# Altium PCB bms_afe_tester-1_1.PcbDoc (part 4 of 6)
Units mm, origin at the board's own origin, x right, y up, seen from the top; angles counter-clockwise.
Board outline 410 x 67 mm, 4 copper layers (L1, L2, L3, L4), stack 1.586 mm thick; 598 components, 356 nets, 1901 pads, 1542 vias.
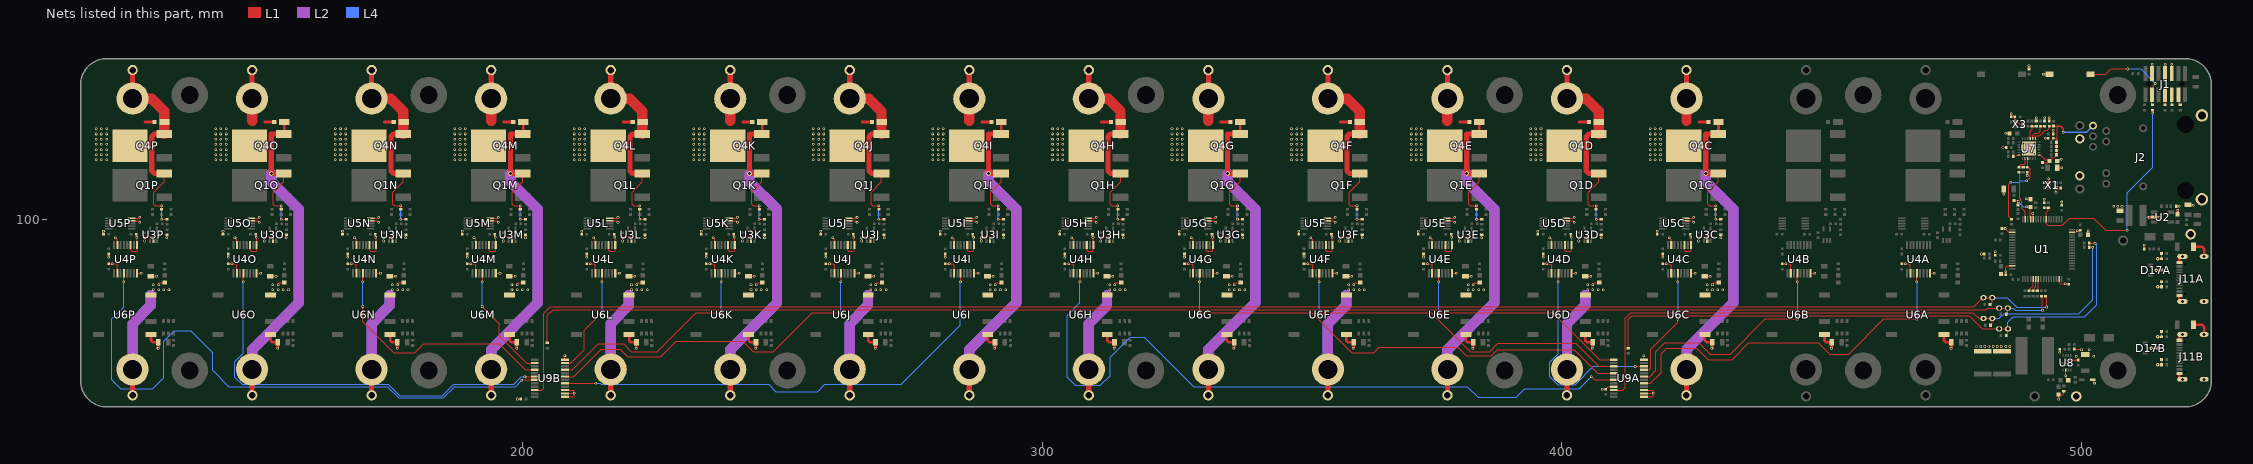
[diagram p5: the nets of this part, all layers, seen from the top]

## Via types
v1: diameter 0.5, hole 0.3, L1 to L4, 1524 vias
v2: diameter 0.65, hole 0.3, L1 to L4, 10 vias
v3: diameter 0.9, hole 0.6, L1 to L4, 8 vias

## Nets (pads, with @x,y where several pads share a name; then routed paths per layer and width w, separated by ;. In a path a pad name is that pad's centre, name@x,y a point inside that pad or via, vN(x,y) a via of type N, cw(c..) or ccw(c..) an arc to the next point about the centre after c; other vN are vias at no path point) (continued)
C2_1_N: C20C.2 C23C.2 C24C.2 C26C.2 C27C.2 D4C.2 D8C.1 H5.1 Q4C.4 R19C.1 TP9.1 U3C.2 U4C.9 U4C.11 U4C.15 U5C.4 U5C.5 U6C.4 | length 29.8
  L1 w0.2: C27C.2@418.4,97.2 v1(418.4,97.8) ; v1(419.4,92.8) C26C.2@419.4,93.4 ; v1(420.7,96.5) 421.065,96.135 U4C.15@421.065,95.1 ; U4C.11@423.605,95.1 423.605,94.095 423.8,93.9 424.7,93.9 424.875,94.075 U4C.9@424.875,95.1 424.875,96.525 v1(424.8,96.6) 424.8,97.1 C24C.2@424.7,97.2 ; U5C.4@423.847,99.775 425.125,99.775 v1(425.4,99.5) ; U5C.5@423.847,100.275 425.175,100.275 v1(425.4,100.5) ; v1(426.3,95.9) C20C.2@426.3,96.5 426.6,96.8 427.8,96.8 428,96.6 U3C.2@428,96 ; C23C.2@427.5,89.15 427.55,89.1 v1(428.6,89.1) v1@428.55,89.15 ; v1(429,87.5) 429,87.781 429.119,87.9 D4C.2@430.2,87.9 ; v1(430.6,96.5) R19C.1@430.6,97.1
  L1 w0.5: 426.4,118.8 D8C.1@428.25,118.8
  L1 w1: H5.1@424,123.3 TP9.1@424,128.8
  L1 w2: 424,119 H5.1@424,123.3
  other v1: 428,86.5 429,86.5 430,86.5 431,86.5 428,87.5 417,111.5 418,111.5 419,111.5 417,112.5 418,112.5 419,112.5 417,113.5 418,113.5 419,113.5 417,114.5 418,114.5 419,114.5 417,115.5 418,115.5 419,115.5 417,116.5 418,116.5 419,116.5 417,117.5 418,117.5 419,117.5
C2_1_P: D8C.2 H6.1 Q1C.3 Q4C.3 R17C.1 R53C.1 TP8.1 | length 119.6
  L1 w0.2: v1(429.6,100.1) R17C.1@430.6,100.1 ; R53C.1@429.6,102 v1(429.6,102.7) 428.4,102.7 428.1,103 428.1,105.3 430.1,107.3 Q1C.3@430.1,108.886
  L1 w0.5: Q4C.3@430.1,116.486 430.15,116.536 D8C.2@430.15,118.8
  L1 w1: TP8.1@424,66.2 H6.1@424,71.2 ; v3(427.7,108.9) 427.7,116.486 Q4C.3@430.1,116.486 ; v3@427.714,108.886 Q1C.3@430.1,108.886
  L2 w2: H6.1@424,71.2 424,75 433,84 433,102 427.7,107.3 v3(427.7,108.9)
  L4 w0.2: v1(429.6,100.1) v1(429.6,102.7)
  L4 w2: H6.1@424,71.2 424,75 433,84 433,102 427.7,107.3 v3(427.7,108.9)
C3_1_N: C20D.2 C23D.2 C24D.2 C26D.2 C27D.2 D4D.2 D8D.1 H7.1 Q4D.4 R19D.1 TP11.1 U3D.2 U4D.9 U4D.11 U4D.15 U5D.4 U5D.5 U6D.4 | length 56.5
  L1 w0.2: C27D.2@395.4,97.2 v1(395.4,97.8) ; v1(396.4,92.8) C26D.2@396.4,93.4 ; v1(397.7,96.5) 398.065,96.135 U4D.15@398.065,95.1 ; U4D.11@400.605,95.1 400.605,94.095 400.8,93.9 401.7,93.9 401.875,94.075 U4D.9@401.875,95.1 401.875,96.525 v1(401.8,96.6) 401.8,97.1 C24D.2@401.7,97.2 ; U5D.4@400.847,99.775 402.125,99.775 v1(402.4,99.5) ; U5D.5@400.847,100.275 402.175,100.275 v1(402.4,100.5) ; v1(403.3,95.9) C20D.2@403.3,96.5 403.6,96.8 404.8,96.8 405,96.6 U3D.2@405,96 ; C23D.2@404.5,89.15 404.55,89.1 v1(405.6,89.1) v1@405.55,89.15 ; v1(406,87.5) 406,87.781 406.119,87.9 D4D.2@407.2,87.9 ; v1(407.6,96.5) R19D.1@407.6,97.1
  L1 w0.5: 403.4,118.8 D8D.1@405.25,118.8
  L1 w1: TP11.1@401,66.2 H7.1@401,71.2
  L2 w2: H7.1@401,71.2 401,80 404.5,83.5 404.5,85.5
  L4 w2: H7.1@401,71.2 401,80 404.5,83.5 404.5,85.5
  other v1: 405,86.5 406,86.5 407,86.5 408,86.5 405,87.5 394,111.5 395,111.5 396,111.5 394,112.5 395,112.5 396,112.5 394,113.5 395,113.5 396,113.5 394,114.5 395,114.5 396,114.5 394,115.5 395,115.5 396,115.5 394,116.5 395,116.5 396,116.5 394,117.5 395,117.5 396,117.5
C3_1_P: D8D.2 H8.1 Q1D.3 Q4D.3 R17D.1 R53D.1 TP10.1 | length 41.5
  L1 w0.2: v1(406.6,100.1) R17D.1@407.6,100.1 ; R53D.1@406.6,102 v1(406.6,102.7) 405.4,102.7 405.1,103 405.1,105.3 407.1,107.3 Q1D.3@407.1,108.886
  L1 w0.5: Q4D.3@407.1,116.486 Q4D.3@407.15,116.536
  L1 w1: H8.1@401,123.3 TP10.1@401,128.8 ; Q1D.3@407.1,108.886 405.214,108.886 404.7,109.4 404.7,116 405.186,116.486 Q4D.3@407.1,116.486
  L1 w2: H8.1@401,123.3 404.7,123.3 407.1,120.9 Q4D.3@407.1,116.486
  L4 w0.2: v1(406.6,100.1) v1(406.6,102.7)
C4_1_N: C20E.2 C23E.2 C24E.2 C26E.2 C27E.2 D4E.2 D8E.1 H9.1 Q4E.4 R19E.1 TP13.1 U3E.2 U4E.9 U4E.11 U4E.15 U5E.4 U5E.5 U6E.4 | length 29.8
  L1 w0.2: C27E.2@372.4,97.2 v1(372.4,97.8) ; v1(373.4,92.8) C26E.2@373.4,93.4 ; v1(374.7,96.5) 375.065,96.135 U4E.15@375.065,95.1 ; U4E.11@377.605,95.1 377.605,94.095 377.8,93.9 378.7,93.9 378.875,94.075 U4E.9@378.875,95.1 378.875,96.525 v1(378.8,96.6) 378.8,97.1 C24E.2@378.7,97.2 ; U5E.4@377.847,99.775 379.125,99.775 v1(379.4,99.5) ; U5E.5@377.847,100.275 379.175,100.275 v1(379.4,100.5) ; v1(380.3,95.9) C20E.2@380.3,96.5 380.6,96.8 381.8,96.8 382,96.6 U3E.2@382,96 ; C23E.2@381.5,89.15 381.55,89.1 v1(382.6,89.1) v1@382.55,89.15 ; v1(383,87.5) 383,87.781 383.119,87.9 D4E.2@384.2,87.9 ; v1(384.6,96.5) R19E.1@384.6,97.1
  L1 w0.5: 380.4,118.8 D8E.1@382.25,118.8
  L1 w1: H9.1@378,123.3 TP13.1@378,128.8
  L1 w2: 378,119 H9.1@378,123.3
  other v1: 382,86.5 383,86.5 384,86.5 385,86.5 382,87.5 371,111.5 372,111.5 373,111.5 371,112.5 372,112.5 373,112.5 371,113.5 372,113.5 373,113.5 371,114.5 372,114.5 373,114.5 371,115.5 372,115.5 373,115.5 371,116.5 372,116.5 373,116.5 371,117.5 372,117.5 373,117.5
C4_1_P: D8E.2 H10.1 Q1E.3 Q4E.3 R17E.1 R53E.1 TP12.1 | length 119.6
  L1 w0.2: v1(383.6,100.1) R17E.1@384.6,100.1 ; R53E.1@383.6,102 v1(383.6,102.7) 382.4,102.7 382.1,103 382.1,105.3 384.1,107.3 Q1E.3@384.1,108.886
  L1 w0.5: Q4E.3@384.1,116.486 384.15,116.536 D8E.2@384.15,118.8
  L1 w1: TP12.1@378,66.2 H10.1@378,71.2 ; v3(381.7,108.9) 381.7,116.486 Q4E.3@384.1,116.486 ; v3@381.714,108.886 Q1E.3@384.1,108.886
  L2 w2: H10.1@378,71.2 378,75 387,84 387,102 381.7,107.3 v3(381.7,108.9)
  L4 w0.2: v1(383.6,100.1) v1(383.6,102.7)
  L4 w2: H10.1@378.014,71.186 378.014,74.986 387.014,83.986 387.014,101.986 381.714,107.286 v3@381.714,108.886
C5_1_N: C20F.2 C23F.2 C24F.2 C26F.2 C27F.2 D4F.2 D8F.1 H11.1 Q4F.4 R19F.1 TP15.1 U3F.2 U4F.9 U4F.11 U4F.15 U5F.4 U5F.5 U6F.4 | length 56.5
  L1 w0.2: C27F.2@349.4,97.2 v1(349.4,97.8) ; v1(350.4,92.8) C26F.2@350.4,93.4 ; v1(351.7,96.5) 352.065,96.135 U4F.15@352.065,95.1 ; U4F.11@354.605,95.1 354.605,94.095 354.8,93.9 355.7,93.9 355.875,94.075 U4F.9@355.875,95.1 355.875,96.525 v1(355.8,96.6) 355.8,97.1 C24F.2@355.7,97.2 ; U5F.4@354.847,99.775 356.125,99.775 v1(356.4,99.5) ; U5F.5@354.847,100.275 356.175,100.275 v1(356.4,100.5) ; v1(357.3,95.9) C20F.2@357.3,96.5 357.6,96.8 358.8,96.8 359,96.6 U3F.2@359,96 ; C23F.2@358.5,89.15 358.55,89.1 v1(359.6,89.1) v1@359.55,89.15 ; v1(360,87.5) 360,87.781 360.119,87.9 D4F.2@361.2,87.9 ; v1(361.6,96.5) R19F.1@361.6,97.1
  L1 w0.5: 357.4,118.8 D8F.1@359.25,118.8
  L1 w1: TP15.1@355,66.2 H11.1@355,71.2
  L2 w2: H11.1@355,71.2 355,80 358.5,83.5 358.5,85.5
  L4 w2: H11.1@355,71.2 355,80 358.5,83.5 358.5,85.5
  other v1: 359,86.5 360,86.5 361,86.5 362,86.5 359,87.5 348,111.5 349,111.5 350,111.5 348,112.5 349,112.5 350,112.5 348,113.5 349,113.5 350,113.5 348,114.5 349,114.5 350,114.5 348,115.5 349,115.5 350,115.5 348,116.5 349,116.5 350,116.5 348,117.5 349,117.5 350,117.5
C5_1_P: D8F.2 H12.1 Q1F.3 Q4F.3 R17F.1 R53F.1 TP14.1 | length 41.5
  L1 w0.2: v1(360.6,100.1) R17F.1@361.6,100.1 ; R53F.1@360.6,102 v1(360.6,102.7) 359.4,102.7 359.1,103 359.1,105.3 361.1,107.3 Q1F.3@361.1,108.886
  L1 w0.5: Q4F.3@361.1,116.486 Q4F.3@361.15,116.536
  L1 w1: H12.1@355,123.3 TP14.1@355,128.8 ; Q1F.3@361.1,108.886 359.214,108.886 358.7,109.4 358.7,116 359.186,116.486 Q4F.3@361.1,116.486
  L1 w2: H12.1@355,123.3 358.7,123.3 361.1,120.9 Q4F.3@361.1,116.486
  L4 w0.2: v1(360.6,100.1) v1(360.6,102.7)
C6_1_N: C20G.2 C23G.2 C24G.2 C26G.2 C27G.2 D4G.2 D8G.1 H13.1 Q4G.4 R19G.1 TP17.1 U3G.2 U4G.9 U4G.11 U4G.15 U5G.4 U5G.5 U6G.4 | length 29.8
  L1 w0.2: C27G.2@326.4,97.2 v1(326.4,97.8) ; v1(327.4,92.8) C26G.2@327.4,93.4 ; v1(328.7,96.5) 329.065,96.135 U4G.15@329.065,95.1 ; U4G.11@331.605,95.1 331.605,94.095 331.8,93.9 332.7,93.9 332.875,94.075 U4G.9@332.875,95.1 332.875,96.525 v1(332.8,96.6) 332.8,97.1 C24G.2@332.7,97.2 ; U5G.4@331.847,99.775 333.125,99.775 v1(333.4,99.5) ; U5G.5@331.847,100.275 333.175,100.275 v1(333.4,100.5) ; v1(334.3,95.9) C20G.2@334.3,96.5 334.6,96.8 335.8,96.8 336,96.6 U3G.2@336,96 ; C23G.2@335.5,89.15 335.55,89.1 v1(336.6,89.1) v1@336.55,89.15 ; v1(337,87.5) 337,87.781 337.119,87.9 D4G.2@338.2,87.9 ; v1(338.6,96.5) R19G.1@338.6,97.1
  L1 w0.5: 334.4,118.8 D8G.1@336.25,118.8
  L1 w1: H13.1@332,123.3 TP17.1@332,128.8
  L1 w2: 332,119 H13.1@332,123.3
  other v1: 336,86.5 337,86.5 338,86.5 339,86.5 336,87.5 325,111.5 326,111.5 327,111.5 325,112.5 326,112.5 327,112.5 325,113.5 326,113.5 327,113.5 325,114.5 326,114.5 327,114.5 325,115.5 326,115.5 327,115.5 325,116.5 326,116.5 327,116.5 325,117.5 326,117.5 327,117.5
C6_1_P: D8G.2 H14.1 Q1G.3 Q4G.3 R17G.1 R53G.1 TP16.1 | length 119.6
  L1 w0.2: v1(337.6,100.1) R17G.1@338.6,100.1 ; R53G.1@337.6,102 v1(337.6,102.7) 336.4,102.7 336.1,103 336.1,105.3 338.1,107.3 Q1G.3@338.1,108.886
  L1 w0.5: Q4G.3@338.1,116.486 338.15,116.536 D8G.2@338.15,118.8
  L1 w1: TP16.1@332,66.2 H14.1@332,71.2 ; v3(335.7,108.9) 335.7,116.486 Q4G.3@338.1,116.486 ; v3@335.714,108.886 Q1G.3@338.1,108.886
  L2 w2: H14.1@332,71.2 332,75 341,84 341,102 335.7,107.3 v3(335.7,108.9)
  L4 w0.2: v1(337.6,100.1) v1(337.6,102.7)
  L4 w2: H14.1@332,71.2 332,75 341,84 341,102 335.7,107.3 v3(335.7,108.9)
C7_1_N: C20H.2 C23H.2 C24H.2 C26H.2 C27H.2 D4H.2 D8H.1 H15.1 Q4H.4 R19H.1 TP19.1 U3H.2 U4H.9 U4H.11 U4H.15 U5H.4 U5H.5 U6H.4 | length 56.5
  L1 w0.2: C27H.2@303.4,97.2 v1(303.4,97.8) ; v1(304.4,92.8) C26H.2@304.4,93.4 ; v1(305.7,96.5) 306.065,96.135 U4H.15@306.065,95.1 ; U4H.11@308.605,95.1 308.605,94.095 308.8,93.9 309.7,93.9 309.875,94.075 U4H.9@309.875,95.1 309.875,96.525 v1(309.8,96.6) 309.8,97.1 C24H.2@309.7,97.2 ; U5H.4@308.847,99.775 310.125,99.775 v1(310.4,99.5) ; U5H.5@308.847,100.275 310.175,100.275 v1(310.4,100.5) ; v1(311.3,95.9) C20H.2@311.3,96.5 311.6,96.8 312.8,96.8 313,96.6 U3H.2@313,96 ; C23H.2@312.5,89.15 312.55,89.1 v1(313.6,89.1) v1@313.55,89.15 ; v1(314,87.5) 314,87.781 314.119,87.9 D4H.2@315.2,87.9 ; v1(315.6,96.5) R19H.1@315.6,97.1
  L1 w0.5: 311.4,118.8 D8H.1@313.25,118.8
  L1 w1: TP19.1@309,66.2 H15.1@309,71.2
  L2 w2: H15.1@309,71.2 309,80 312.5,83.5 312.5,85.5
  L4 w2: H15.1@309,71.2 309,80 312.5,83.5 312.5,85.5
  other v1: 313,86.5 314,86.5 315,86.5 316,86.5 313,87.5 302,111.5 303,111.5 304,111.5 302,112.5 303,112.5 304,112.5 302,113.5 303,113.5 304,113.5 302,114.5 303,114.5 304,114.5 302,115.5 303,115.5 304,115.5 302,116.5 303,116.5 304,116.5 302,117.5 303,117.5 304,117.5
C7_1_P: D8H.2 H16.1 Q1H.3 Q4H.3 R17H.1 R53H.1 TP18.1 | length 41.5
  L1 w0.2: v1(314.6,100.1) R17H.1@315.6,100.1 ; R53H.1@314.6,102 v1(314.6,102.7) 313.4,102.7 313.1,103 313.1,105.3 315.1,107.3 Q1H.3@315.1,108.886
  L1 w0.5: Q4H.3@315.1,116.486 Q4H.3@315.15,116.536
  L1 w1: H16.1@309,123.3 TP18.1@309,128.8 ; Q1H.3@315.1,108.886 313.214,108.886 312.7,109.4 312.7,116 313.186,116.486 Q4H.3@315.1,116.486
  L1 w2: H16.1@309,123.3 312.7,123.3 315.1,120.9 Q4H.3@315.1,116.486
  L4 w0.2: v1(314.6,100.1) v1(314.6,102.7)
C8_1_N: C20I.2 C23I.2 C24I.2 C26I.2 C27I.2 D4I.2 D8I.1 H17.1 Q4I.4 R19I.1 TP21.1 U3I.2 U4I.9 U4I.11 U4I.15 U5I.4 U5I.5 U6I.4 | length 29.8
  L1 w0.2: C27I.2@280.4,97.2 v1(280.4,97.8) ; v1(281.4,92.8) C26I.2@281.4,93.4 ; v1(282.7,96.5) 283.065,96.135 U4I.15@283.065,95.1 ; U4I.11@285.605,95.1 285.605,94.095 285.8,93.9 286.7,93.9 286.875,94.075 U4I.9@286.875,95.1 286.875,96.525 v1(286.8,96.6) 286.8,97.1 C24I.2@286.7,97.2 ; U5I.4@285.847,99.775 287.125,99.775 v1(287.4,99.5) ; U5I.5@285.847,100.275 287.175,100.275 v1(287.4,100.5) ; v1(288.3,95.9) C20I.2@288.3,96.5 288.6,96.8 289.8,96.8 290,96.6 U3I.2@290,96 ; C23I.2@289.5,89.15 289.55,89.1 v1(290.6,89.1) v1@290.55,89.15 ; v1(291,87.5) 291,87.781 291.119,87.9 D4I.2@292.2,87.9 ; v1(292.6,96.5) R19I.1@292.6,97.1
  L1 w0.5: 288.4,118.8 D8I.1@290.25,118.8
  L1 w1: H17.1@286,123.3 TP21.1@286,128.8
  L1 w2: 286,119 H17.1@286,123.3
  other v1: 290,86.5 291,86.5 292,86.5 293,86.5 290,87.5 279,111.5 280,111.5 281,111.5 279,112.5 280,112.5 281,112.5 279,113.5 280,113.5 281,113.5 279,114.5 280,114.5 281,114.5 279,115.5 280,115.5 281,115.5 279,116.5 280,116.5 281,116.5 279,117.5 280,117.5 281,117.5
C8_1_P: D8I.2 H18.1 Q1I.3 Q4I.3 R17I.1 R53I.1 TP20.1 | length 119.6
  L1 w0.2: v1(291.6,100.1) R17I.1@292.6,100.1 ; R53I.1@291.6,102 v1(291.6,102.7) 290.4,102.7 290.1,103 290.1,105.3 292.1,107.3 Q1I.3@292.1,108.886
  L1 w0.5: Q4I.3@292.1,116.486 292.15,116.536 D8I.2@292.15,118.8
  L1 w1: TP20.1@286,66.2 H18.1@286,71.2 ; v3(289.7,108.9) 289.7,116.486 Q4I.3@292.1,116.486 ; v3@289.714,108.886 Q1I.3@292.1,108.886
  L2 w2: H18.1@286,71.2 286,75 295,84 295,102 289.7,107.3 v3(289.7,108.9)
  L4 w0.2: v1(291.6,100.1) v1(291.6,102.7)
  L4 w2: H18.1@286,71.2 286,75 295,84 295,102 289.7,107.3 v3(289.7,108.9)
C9_1_N: C20J.2 C23J.2 C24J.2 C26J.2 C27J.2 D4J.2 D8J.1 H19.1 Q4J.4 R19J.1 TP23.1 U3J.2 U4J.9 U4J.11 U4J.15 U5J.4 U5J.5 U6J.4 | length 56.5
  L1 w0.2: C27J.2@257.4,97.2 v1(257.4,97.8) ; v1(258.4,92.8) C26J.2@258.4,93.4 ; v1(259.7,96.5) 260.065,96.135 U4J.15@260.065,95.1 ; U4J.11@262.605,95.1 262.605,94.095 262.8,93.9 263.7,93.9 263.875,94.075 U4J.9@263.875,95.1 263.875,96.525 v1(263.8,96.6) 263.8,97.1 C24J.2@263.7,97.2 ; U5J.4@262.847,99.775 264.125,99.775 v1(264.4,99.5) ; U5J.5@262.847,100.275 264.175,100.275 v1(264.4,100.5) ; v1(265.3,95.9) C20J.2@265.3,96.5 265.6,96.8 266.8,96.8 267,96.6 U3J.2@267,96 ; C23J.2@266.5,89.15 266.55,89.1 v1(267.6,89.1) v1@267.55,89.15 ; v1(268,87.5) 268,87.781 268.119,87.9 D4J.2@269.2,87.9 ; v1(269.6,96.5) R19J.1@269.6,97.1
  L1 w0.5: 265.4,118.8 D8J.1@267.25,118.8
  L1 w1: TP23.1@263,66.2 H19.1@263,71.2
  L2 w2: H19.1@263,71.2 263,80 266.5,83.5 266.5,85.5
  L4 w2: H19.1@263,71.2 263,80 266.5,83.5 266.5,85.5
  other v1: 267,86.5 268,86.5 269,86.5 270,86.5 267,87.5 256,111.5 257,111.5 258,111.5 256,112.5 257,112.5 258,112.5 256,113.5 257,113.5 258,113.5 256,114.5 257,114.5 258,114.5 256,115.5 257,115.5 258,115.5 256,116.5 257,116.5 258,116.5 256,117.5 257,117.5 258,117.5
C9_1_P: D8J.2 H20.1 Q1J.3 Q4J.3 R17J.1 R53J.1 TP22.1 | length 41.5
  L1 w0.2: v1(268.6,100.1) R17J.1@269.6,100.1 ; R53J.1@268.6,102 v1(268.6,102.7) 267.4,102.7 267.1,103 267.1,105.3 269.1,107.3 Q1J.3@269.1,108.886
  L1 w0.5: Q4J.3@269.1,116.486 Q4J.3@269.15,116.536
  L1 w1: H20.1@263,123.3 TP22.1@263,128.8 ; Q1J.3@269.1,108.886 267.214,108.886 266.7,109.4 266.7,116 267.186,116.486 Q4J.3@269.1,116.486
  L1 w2: H20.1@263,123.3 266.7,123.3 269.1,120.9 Q4J.3@269.1,116.486
  L4 w0.2: v1(268.6,100.1) v1(268.6,102.7)
C10_1_N: C20K.2 C23K.2 C24K.2 C26K.2 C27K.2 D4K.2 D8K.1 H21.1 Q4K.4 R19K.1 TP25.1 U3K.2 U4K.9 U4K.11 U4K.15 U5K.4 U5K.5 U6K.4 | length 29.8
  L1 w0.2: C27K.2@234.4,97.2 v1(234.4,97.8) ; v1(235.4,92.8) C26K.2@235.4,93.4 ; v1(236.7,96.5) 237.065,96.135 U4K.15@237.065,95.1 ; U4K.11@239.605,95.1 239.605,94.095 239.8,93.9 240.7,93.9 240.875,94.075 U4K.9@240.875,95.1 240.875,96.525 v1(240.8,96.6) 240.8,97.1 C24K.2@240.7,97.2 ; U5K.4@239.847,99.775 241.125,99.775 v1(241.4,99.5) ; U5K.5@239.847,100.275 241.175,100.275 v1(241.4,100.5) ; v1(242.3,95.9) C20K.2@242.3,96.5 242.6,96.8 243.8,96.8 244,96.6 U3K.2@244,96 ; C23K.2@243.5,89.15 243.55,89.1 v1(244.6,89.1) v1@244.55,89.15 ; v1(245,87.5) 245,87.781 245.119,87.9 D4K.2@246.2,87.9 ; v1(246.6,96.5) R19K.1@246.6,97.1
  L1 w0.5: 242.4,118.8 D8K.1@244.25,118.8
  L1 w1: H21.1@240,123.3 TP25.1@240,128.8
  L1 w2: 240,119 H21.1@240,123.3
  other v1: 244,86.5 245,86.5 246,86.5 247,86.5 244,87.5 233,111.5 234,111.5 235,111.5 233,112.5 234,112.5 235,112.5 233,113.5 234,113.5 235,113.5 233,114.5 234,114.5 235,114.5 233,115.5 234,115.5 235,115.5 233,116.5 234,116.5 235,116.5 233,117.5 234,117.5 235,117.5
C10_1_P: D8K.2 H22.1 Q1K.3 Q4K.3 R17K.1 R53K.1 TP24.1 | length 119.6
  L1 w0.2: v1(245.6,100.1) R17K.1@246.6,100.1 ; R53K.1@245.6,102 v1(245.6,102.7) 244.4,102.7 244.1,103 244.1,105.3 246.1,107.3 Q1K.3@246.1,108.886
  L1 w0.5: Q4K.3@246.1,116.486 246.15,116.536 D8K.2@246.15,118.8
  L1 w1: TP24.1@240,66.2 H22.1@240,71.2 ; v3(243.7,108.9) 243.7,116.486 Q4K.3@246.1,116.486 ; v3@243.714,108.886 Q1K.3@246.1,108.886
  L2 w2: H22.1@240,71.2 240,75 249,84 249,102 243.7,107.3 v3(243.7,108.9)
  L4 w0.2: v1(245.6,100.1) v1(245.6,102.7)
  L4 w2: H22.1@240,71.2 240,75 249,84 249,102 243.7,107.3 v3(243.7,108.9)
C11_1_N: C20L.2 C23L.2 C24L.2 C26L.2 C27L.2 D4L.2 D8L.1 H23.1 Q4L.4 R19L.1 TP27.1 U3L.2 U4L.9 U4L.11 U4L.15 U5L.4 U5L.5 U6L.4 | length 56.5
  L1 w0.2: C27L.2@211.4,97.2 v1(211.4,97.8) ; v1(212.4,92.8) C26L.2@212.4,93.4 ; v1(213.7,96.5) 214.065,96.135 U4L.15@214.065,95.1 ; U4L.11@216.605,95.1 216.605,94.095 216.8,93.9 217.7,93.9 217.875,94.075 U4L.9@217.875,95.1 217.875,96.525 v1(217.8,96.6) 217.8,97.1 C24L.2@217.7,97.2 ; U5L.4@216.847,99.775 218.125,99.775 v1(218.4,99.5) ; U5L.5@216.847,100.275 218.175,100.275 v1(218.4,100.5) ; v1(219.3,95.9) C20L.2@219.3,96.5 219.6,96.8 220.8,96.8 221,96.6 U3L.2@221,96 ; C23L.2@220.5,89.15 220.55,89.1 v1(221.6,89.1) v1@221.55,89.15 ; v1(222,87.5) 222,87.781 222.119,87.9 D4L.2@223.2,87.9 ; v1(223.6,96.5) R19L.1@223.6,97.1
  L1 w0.5: 219.4,118.8 D8L.1@221.25,118.8
  L1 w1: TP27.1@217,66.2 H23.1@217,71.2
  L2 w2: H23.1@217,71.2 217,80 220.5,83.5 220.5,85.5
  L4 w2: H23.1@217,71.2 217,80 220.5,83.5 220.5,85.5
  other v1: 221,86.5 222,86.5 223,86.5 224,86.5 221,87.5 210,111.5 211,111.5 212,111.5 210,112.5 211,112.5 212,112.5 210,113.5 211,113.5 212,113.5 210,114.5 211,114.5 212,114.5 210,115.5 211,115.5 212,115.5 210,116.5 211,116.5 212,116.5 210,117.5 211,117.5 212,117.5
C11_1_P: D8L.2 H24.1 Q1L.3 Q4L.3 R17L.1 R53L.1 TP26.1 | length 41.5
  L1 w0.2: v1(222.6,100.1) R17L.1@223.6,100.1 ; R53L.1@222.6,102 v1(222.6,102.7) 221.4,102.7 221.1,103 221.1,105.3 223.1,107.3 Q1L.3@223.1,108.886
  L1 w0.5: Q4L.3@223.1,116.486 Q4L.3@223.15,116.536
  L1 w1: H24.1@217,123.3 TP26.1@217,128.8 ; Q1L.3@223.1,108.886 221.214,108.886 220.7,109.4 220.7,116 221.186,116.486 Q4L.3@223.1,116.486
  L1 w2: H24.1@217,123.3 220.7,123.3 223.1,120.9 Q4L.3@223.1,116.486
  L4 w0.2: v1(222.6,100.1) v1(222.6,102.7)
C12_1_N: C20M.2 C23M.2 C24M.2 C26M.2 C27M.2 D4M.2 D8M.1 H25.1 Q4M.4 R19M.1 TP29.1 U3M.2 U4M.9 U4M.11 U4M.15 U5M.4 U5M.5 U6M.4 | length 29.8
  L1 w0.2: C27M.2@188.4,97.2 v1(188.4,97.8) ; v1(189.4,92.8) C26M.2@189.4,93.4 ; v1(190.7,96.5) 191.065,96.135 U4M.15@191.065,95.1 ; U4M.11@193.605,95.1 193.605,94.095 193.8,93.9 194.7,93.9 194.875,94.075 U4M.9@194.875,95.1 194.875,96.525 v1(194.8,96.6) 194.8,97.1 C24M.2@194.7,97.2 ; U5M.4@193.847,99.775 195.125,99.775 v1(195.4,99.5) ; U5M.5@193.847,100.275 195.175,100.275 v1(195.4,100.5) ; v1(196.3,95.9) C20M.2@196.3,96.5 196.6,96.8 197.8,96.8 198,96.6 U3M.2@198,96 ; C23M.2@197.5,89.15 197.55,89.1 v1(198.6,89.1) v1@198.55,89.15 ; v1(199,87.5) 199,87.781 199.119,87.9 D4M.2@200.2,87.9 ; v1(200.6,96.5) R19M.1@200.6,97.1
  L1 w0.5: 196.4,118.8 D8M.1@198.25,118.8
  L1 w1: H25.1@194,123.3 TP29.1@194,128.8
  L1 w2: 194,119 H25.1@194,123.3
  other v1: 198,86.5 199,86.5 200,86.5 201,86.5 198,87.5 187,111.5 188,111.5 189,111.5 187,112.5 188,112.5 189,112.5 187,113.5 188,113.5 189,113.5 187,114.5 188,114.5 189,114.5 187,115.5 188,115.5 189,115.5 187,116.5 188,116.5 189,116.5 187,117.5 188,117.5 189,117.5
C12_1_P: D8M.2 H26.1 Q1M.3 Q4M.3 R17M.1 R53M.1 TP28.1 | length 119.6
  L1 w0.2: v1(199.6,100.1) R17M.1@200.6,100.1 ; R53M.1@199.6,102 v1(199.6,102.7) 198.4,102.7 198.1,103 198.1,105.3 200.1,107.3 Q1M.3@200.1,108.886
  L1 w0.5: Q4M.3@200.1,116.486 200.15,116.536 D8M.2@200.15,118.8
  L1 w1: TP28.1@194,66.2 H26.1@194,71.2 ; v3(197.7,108.9) 197.7,116.486 Q4M.3@200.1,116.486 ; v3@197.714,108.886 Q1M.3@200.1,108.886
  L2 w2: H26.1@194,71.2 194,75 203,84 203,102 197.7,107.3 v3(197.7,108.9)
  L4 w0.2: v1(199.6,100.1) v1(199.6,102.7)
  L4 w2: H26.1@194,71.2 194,75 203,84 203,102 197.7,107.3 v3(197.7,108.9)
C13_1_N: C20N.2 C23N.2 C24N.2 C26N.2 C27N.2 D4N.2 D8N.1 H27.1 Q4N.4 R19N.1 TP31.1 U3N.2 U4N.9 U4N.11 U4N.15 U5N.4 U5N.5 U6N.4 | length 56.5
  L1 w0.2: C27N.2@165.4,97.2 v1(165.4,97.8) ; v1(166.4,92.8) C26N.2@166.4,93.4 ; v1(167.7,96.5) 168.065,96.135 U4N.15@168.065,95.1 ; U4N.11@170.605,95.1 170.605,94.095 170.8,93.9 171.7,93.9 171.875,94.075 U4N.9@171.875,95.1 171.875,96.525 v1(171.8,96.6) 171.8,97.1 C24N.2@171.7,97.2 ; U5N.4@170.847,99.775 172.125,99.775 v1(172.4,99.5) ; U5N.5@170.847,100.275 172.175,100.275 v1(172.4,100.5) ; v1(173.3,95.9) C20N.2@173.3,96.5 173.6,96.8 174.8,96.8 175,96.6 U3N.2@175,96 ; C23N.2@174.5,89.15 174.55,89.1 v1(175.6,89.1) v1@175.55,89.15 ; v1(176,87.5) 176,87.781 176.119,87.9 D4N.2@177.2,87.9 ; v1(177.6,96.5) R19N.1@177.6,97.1
  L1 w0.5: 173.4,118.8 D8N.1@175.25,118.8
  L1 w1: TP31.1@171,66.2 H27.1@171,71.2
  L2 w2: H27.1@171,71.2 171,80 174.5,83.5 174.5,85.5
  L4 w2: H27.1@171,71.2 171,80 174.5,83.5 174.5,85.5
  other v1: 175,86.5 176,86.5 177,86.5 178,86.5 175,87.5 164,111.5 165,111.5 166,111.5 164,112.5 165,112.5 166,112.5 164,113.5 165,113.5 166,113.5 164,114.5 165,114.5 166,114.5 164,115.5 165,115.5 166,115.5 164,116.5 165,116.5 166,116.5 164,117.5 165,117.5 166,117.5
C13_1_P: D8N.2 H28.1 Q1N.3 Q4N.3 R17N.1 R53N.1 TP30.1 | length 41.5
  L1 w0.2: v1(176.6,100.1) R17N.1@177.6,100.1 ; R53N.1@176.6,102 v1(176.6,102.7) 175.4,102.7 175.1,103 175.1,105.3 177.1,107.3 Q1N.3@177.1,108.886
  L1 w0.5: Q4N.3@177.1,116.486 Q4N.3@177.15,116.536
  L1 w1: H28.1@171,123.3 TP30.1@171,128.8 ; Q1N.3@177.1,108.886 175.214,108.886 174.7,109.4 174.7,116 175.186,116.486 Q4N.3@177.1,116.486
  L1 w2: H28.1@171,123.3 174.7,123.3 177.1,120.9 Q4N.3@177.1,116.486
  L4 w0.2: v1(176.6,100.1) v1(176.6,102.7)
C14_1_N: C20O.2 C23O.2 C24O.2 C26O.2 C27O.2 D4O.2 D8O.1 H29.1 Q4O.4 R19O.1 TP34.1 U3O.2 U4O.9 U4O.11 U4O.15 U5O.4 U5O.5 U6O.4 | length 29.8
  L1 w0.2: C27O.2@142.4,97.2 v1(142.4,97.8) ; v1(143.4,92.8) C26O.2@143.4,93.4 ; v1(144.7,96.5) 145.065,96.135 U4O.15@145.065,95.1 ; U4O.11@147.605,95.1 147.605,94.095 147.8,93.9 148.7,93.9 148.875,94.075 U4O.9@148.875,95.1 148.875,96.525 v1(148.8,96.6) 148.8,97.1 C24O.2@148.7,97.2 ; U5O.4@147.847,99.775 149.125,99.775 v1(149.4,99.5) ; U5O.5@147.847,100.275 149.175,100.275 v1(149.4,100.5) ; v1(150.3,95.9) C20O.2@150.3,96.5 150.6,96.8 151.8,96.8 152,96.6 U3O.2@152,96 ; C23O.2@151.5,89.15 151.55,89.1 v1(152.6,89.1) v1@152.55,89.15 ; v1(153,87.5) 153,87.781 153.119,87.9 D4O.2@154.2,87.9 ; v1(154.6,96.5) R19O.1@154.6,97.1
  L1 w0.5: 150.4,118.8 D8O.1@152.25,118.8
  L1 w1: H29.1@148,123.3 TP34.1@148,128.8
  L1 w2: 148,119 H29.1@148,123.3
  other v1: 152,86.5 153,86.5 154,86.5 155,86.5 152,87.5 141,111.5 142,111.5 143,111.5 141,112.5 142,112.5 143,112.5 141,113.5 142,113.5 143,113.5 141,114.5 142,114.5 143,114.5 141,115.5 142,115.5 143,115.5 141,116.5 142,116.5 143,116.5 141,117.5 142,117.5 143,117.5
C14_1_P: D8O.2 H30.1 Q1O.3 Q4O.3 R17O.1 R53O.1 TP32.1 | length 119.6
  L1 w0.2: v1(153.6,100.1) R17O.1@154.6,100.1 ; R53O.1@153.6,102 v1(153.6,102.7) 152.4,102.7 152.1,103 152.1,105.3 154.1,107.3 Q1O.3@154.1,108.886
  L1 w0.5: Q4O.3@154.1,116.486 154.15,116.536 D8O.2@154.15,118.8
  L1 w1: TP32.1@148,66.2 H30.1@148,71.2 ; v3(151.7,108.9) 151.7,116.486 Q4O.3@154.1,116.486 ; v3@151.714,108.886 Q1O.3@154.1,108.886
  L2 w2: H30.1@148,71.2 148,75 157,84 157,102 151.7,107.3 v3(151.7,108.9)
  L4 w0.2: v1(153.6,100.1) v1(153.6,102.7)
  L4 w2: H30.1@148,71.2 148,75 157,84 157,102 151.7,107.3 v3(151.7,108.9)
C15_1_N: C20P.2 C23P.2 C24P.2 C26P.2 C27P.2 D4P.2 D8P.1 H31.1 Q4P.4 R19P.1 TP38.1 U3P.2 U4P.9 U4P.11 U4P.15 U5P.4 U5P.5 U6P.4 | length 56.5
  L1 w0.2: C27P.2@119.4,97.2 v1(119.4,97.8) ; v1(120.4,92.8) C26P.2@120.4,93.4 ; v1(121.7,96.5) 122.065,96.135 U4P.15@122.065,95.1 ; U4P.11@124.605,95.1 124.605,94.095 124.8,93.9 125.7,93.9 125.875,94.075 U4P.9@125.875,95.1 125.875,96.525 v1(125.8,96.6) 125.8,97.1 C24P.2@125.7,97.2 ; U5P.4@124.847,99.775 126.125,99.775 v1(126.4,99.5) ; U5P.5@124.847,100.275 126.175,100.275 v1(126.4,100.5) ; v1(127.3,95.9) C20P.2@127.3,96.5 127.6,96.8 128.8,96.8 129,96.6 U3P.2@129,96 ; C23P.2@128.5,89.15 128.55,89.1 v1(129.6,89.1) v1@129.55,89.15 ; v1(130,87.5) 130,87.781 130.119,87.9 D4P.2@131.2,87.9 ; v1(131.6,96.5) R19P.1@131.6,97.1
  L1 w0.5: 127.4,118.8 D8P.1@129.25,118.8
  L1 w1: TP38.1@125,66.2 H31.1@125,71.2
  L2 w2: H31.1@125,71.2 125,80 128.5,83.5 128.5,85.5
  L4 w2: H31.1@125,71.2 125,80 128.5,83.5 128.5,85.5
  other v1: 129,86.5 130,86.5 131,86.5 132,86.5 129,87.5 118,111.5 119,111.5 120,111.5 118,112.5 119,112.5 120,112.5 118,113.5 119,113.5 120,113.5 118,114.5 119,114.5 120,114.5 118,115.5 119,115.5 120,115.5 118,116.5 119,116.5 120,116.5 118,117.5 119,117.5 120,117.5
C15_1_P: D8P.2 H32.1 Q1P.3 Q4P.3 R17P.1 R53P.1 TP36.1 | length 41.5
  L1 w0.2: v1(130.6,100.1) R17P.1@131.6,100.1 ; R53P.1@130.6,102 v1(130.6,102.7) 129.4,102.7 129.1,103 129.1,105.3 131.1,107.3 Q1P.3@131.1,108.886
  L1 w1: H32.1@125,123.3 TP36.1@125,128.8 ; Q1P.3@131.1,108.886 129.214,108.886 128.7,109.4 128.7,116 129.186,116.486 Q4P.3@131.1,116.486
  L1 w2: H32.1@125,123.3 128.7,123.3 131.1,120.9 Q4P.3@131.1,116.486
  L4 w0.2: v1(130.6,100.1) v1(130.6,102.7)
CONN_nRST_2: J1.12 R32.2 S2.2 | length 18.4
  L1 w0.203: S2.2@501.75,128 504.7,128 505.7,129 v1(508.9,129) ; R32.2@513.7,122.1 513.56,122.24 J1.12@513.56,124.068 513.8,124.308 513.8,125.8 v1(514.2,126.2)
  L4 w0.203: v1(508.9,129) 511.4,129 v1(514.2,126.2)
CONN_SWCLK_2: J1.6 R26.2 | length 2
  L1 w0.2: J1.6@517.37,124.068 517.4,124.038 R26.2@517.4,122.1
CONN_SWDIO_2: J1.4 R22.2 | length 2.1
  L1 w0.203: J1.4@518.64,124.068 518.8,123.908 518.8,122.3 R22.2@519,122.1
CONN_SWO_2: J1.8 R6.2 | length 2
  L1 w0.2: R6.2@516.1,122.1 J1.8@516.1,124.068
ETH_MDIO: R81.1 U7.12 | length 1.2
  L1 w0.2: R81.1@486.9,112.2 487.3,112.2 487.55,112.45 U7.12@487.95,112.45
ETH_nRST_1: C51.1 R3.1 R83.2 U7.15 | length 16.2
  L1 w0.2: v1(486.4,107.2) 486,106.8 486,100.6 R3.1@486.5,100.1 ; R83.2@488.8,110.1 C51.1@489.6,110.1 ; v1(489.5,107.5) 490.117,108.117 490.117,109.683 489.65,110.15 U7.15@489.65,111.75
  L4 w0.2: v1(486.4,107.2) 488,107.2 488.3,107.5 v1(489.5,107.5)
ETH_REFCLK_1: R82.2 U1.15 | length 9.5
  L1 w0.203: R82.2@488.1,109.1 488.1,104 488.5,103.6 488.5,102.2 489.2,101.5 U1.15@489.2,100.1
ETH_REFCLKO: R82.1 U7.14 | length 2.5
  L1 w0.2: R82.1@488,110.1 488.2,110.3 488.2,110.5 488.4,110.7 489,110.7 489.15,110.85 U7.14@489.15,111.75
ETH_VDDA: C36.1 C47.1 C56.1 FB3.2 J2.7 R84.2 R87.1 R88.1 R89.1 R90.1 U7.1 U7.19 | length 26.2
  L1 w0.2: U7.1@491.15,115.65 491.15,116.05 491.3,116.2 492,116.2 493,117.2 493.4,117.2 493.8,117.6 C56.1@493.8,118 ; U7.19@491.85,112.45 492.15,112.45 493.023,111.577 493.573,111.577 C47.1@493.85,111.3 ; R84.2@492.5,111 493.55,111 C47.1@493.85,111.3 ; C36.1@494.6,115.7 495.3,115.7 ; 495.3,118 495.3,115.7 ; C47.1@493.85,111.3 494.1,111.55 494.1,111.8 494.2,111.9 494.7,111.9 495.05,112.25 495.05,112.35 R89.1@495.2,112.5 R87.1@495.2,113.3 R90.1@495.2,114.1 R88.1@495.2,114.9 495.2,115.4 495.3,115.5 495.3,115.7
  L1 w0.3: C56.1@493.8,118 494.6,118 495.3,118 496,118 496.5,117.5 v1(496.5,116.8)
  L4 w0.3: v1(496.5,116.8) 500.924,116.8 J2.7@502.22,118.096
GND: C1.2 C2.2 C3.2 C4.2 C5.2 C6A.2 C6B.2 C7.2 C8.2 C9.2 C10.2 C12.2 C13.2 C14.2 C15.2 C16.2 C17.2 C18.2 C19.2 C22A.2 C22B.2 C22C.2 C22D.2 C22E.2 C22F.2 C22G.2 C22H.2 C22I.2 C22J.2 C22K.2 C22L.2 C22M.2 C22N.2 C22O.2 C22P.2 C25A.2 C25B.2 C25C.2 C25D.2 C25E.2 C25F.2 C25G.2 C25H.2 C25I.2 C25J.2 C25K.2 C25L.2 C25M.2 C25N.2 C25O.2 C25P.2 C29.2 C30.2 C31.2 C32.2 C33.2 C34A.2 C34B.2 C35A.2 C35B.2 C36.2 C39.2 C47.2 C48.2 C49.2 C50.2 C51.2 C52.2 C53.2 C56.2 C80A.2 C80B.2 D5.1 D17A.3 D17B.3 J1.5 J1.7 J1.11 J2.13 J2.14 J2.SHLD J11A.0 J11A.A1 J11A.B1 J11B.0 J11B.A1 J11B.B1 R10.2 R12A.2 R12B.2 R13A.2 R13B.2 R15.2 R24.1 R27.2 R39.2 R51.1 R86.2 R95.2 R98.2 S2.1 TP39.1 TP43.1 U1.12 U1.18 U1.31 U1.47 U1.63 U2.2 U4A.2 U4A.8 U4B.2 U4B.8 U4C.2 U4C.8 U4D.2 U4D.8 U4E.2 U4E.8 U4F.2 U4F.8 U4G.2 U4G.8 U4H.2 U4H.8 U4I.2 U4I.8 U4J.2 U4J.8 U4K.2 U4K.8 U4L.2 U4L.8 U4M.2 U4M.8 U4N.2 U4N.8 U4O.2 U4O.8 U4P.2 U4P.8 U6A.1 U6B.1 U6C.1 U6D.1 U6E.1 U6F.1 U6G.1 U6H.1 U6I.1 U6J.1 U6K.1 U6L.1 U6M.1 U6N.1 U6O.1 U6P.1 U7.EP U8.2 U8.10 U9A.1 U9A.2 U9A.3 U9A.12 U9A.21 U9B.1 U9B.2 U9B.3 U9B.12 X1.2 X1.4 X3.2 X3.4 | length 218
  L1 w0.2: C25P.2@120.4,91.5 v1(121.1,91.5) 121.8,91.5 122.065,91.235 U4P.2@122.065,89.7 ; U4P.8@125.875,89.7 v1(126.7,89.7) ; C25O.2@143.4,91.5 v1(144.1,91.5) 144.8,91.5 145.065,91.235 U4O.2@145.065,89.7 ; U4O.8@148.875,89.7 v1(149.7,89.7) ; C25N.2@166.4,91.5 v1(167.1,91.5) 167.8,91.5 168.065,91.235 U4N.2@168.065,89.7 ; U4N.8@171.875,89.7 v1(172.7,89.7) ; C25M.2@189.4,91.5 v1(190.1,91.5) 190.8,91.5 191.065,91.235 U4M.2@191.065,89.7 ; U4M.8@194.875,89.7 v1(195.7,89.7) ; v1(199,65.5) C6B.2@199.7,65.5 ; U9B.1@208.2,65.925 210,65.925 v1(210,66.575) ; U9B.2@208.2,66.575 v1(210,66.575) ; U9B.3@208.2,67.225 208.225,67.2 210,67.2 v1(210,66.575) ; U9B.12@208.2,73.075 v1(208.2,73.8) ; C25L.2@212.4,91.5 v1(213.1,91.5) 213.8,91.5 214.065,91.235 U4L.2@214.065,89.7 ; U4L.8@217.875,89.7 v1(218.7,89.7) ; C25K.2@235.4,91.5 v1(236.1,91.5) 236.8,91.5 237.065,91.235 U4K.2@237.065,89.7 ; U4K.8@240.875,89.7 v1(241.7,89.7) ; C25J.2@258.4,91.5 v1(259.1,91.5) 259.8,91.5 260.065,91.235 U4J.2@260.065,89.7 ; U4J.8@263.875,89.7 v1(264.7,89.7) ; C25I.2@281.4,91.5 v1(282.1,91.5) 282.8,91.5 283.065,91.235 U4I.2@283.065,89.7 ; U4I.8@286.875,89.7 v1(287.7,89.7) ; C25H.2@304.4,91.5 v1(305.1,91.5) 305.8,91.5 306.065,91.235 U4H.2@306.065,89.7 ; U4H.8@309.875,89.7 v1(310.7,89.7) ; C25G.2@327.4,91.5 v1(328.1,91.5) 328.8,91.5 329.065,91.235 U4G.2@329.065,89.7 ; U4G.8@332.875,89.7 v1(333.7,89.7) ; C25F.2@350.4,91.5 v1(351.1,91.5) 351.8,91.5 352.065,91.235 U4F.2@352.065,89.7 ; U4F.8@355.875,89.7 v1(356.7,89.7) ; C25E.2@373.4,91.5 v1(374.1,91.5) 374.8,91.5 375.065,91.235 U4E.2@375.065,89.7 ; U4E.8@378.875,89.7 v1(379.7,89.7) ; C25D.2@396.4,91.5 v1(397.1,91.5) 397.8,91.5 398.065,91.235 U4D.2@398.065,89.7 ; U4D.8@401.875,89.7 v1(402.7,89.7) ; v1(407.8,67.4) C6A.2@408.5,67.4 408.975,67.875 U9A.21@410,67.875 ; U9A.1@415.8,65.925 417.6,65.925 v1(417.6,66.575) ; U9A.2@415.8,66.575 v1(417.6,66.575) ; U9A.3@415.8,67.225 415.825,67.2 417.6,67.2 v1(417.6,66.575) ; U9A.12@415.8,73.075 v1(415.8,73.8) ; C25C.2@419.4,91.5 v1(420.1,91.5) 420.8,91.5 421.065,91.235 U4C.2@421.065,89.7 ; U4C.8@424.875,89.7 v1(425.7,89.7) ; C25B.2@442.4,91.5 v1(443.1,91.5) 443.8,91.5 444.065,91.235 U4B.2@444.065,89.7 ; U4B.8@447.875,89.7 v1(448.7,89.7) ; C25A.2@465.4,91.5 v1(466.1,91.5) 466.8,91.5 467.065,91.235 U4A.2@467.065,89.7 ; U4A.8@470.875,89.7 v1(471.7,89.7) ; v1(480.7,93.4) R24.1@481.3,93.4 ; C3.2@483.4,93.2 v1(483.4,93.8) ; C2.2@484.5,89.55 484.65,89.4 C8.2@485.4,89.4 v1(485.4,90) 485.4,90.8 485.7,91.1 U1.31@486.7,91.1 ; C4.2@484.7,98.3 v1(485.3,98.3) 486,97.6 U1.18@486.7,97.6 ; v1(484.9,113.9) C49.2@485.5,113.9 ; C13.2@485.05,105.9 485.05,104.884 v1(485.056,104.878) ; v1(485.4,116.6) C50.2@486.15,116.6 ; v1(486.5,120.4) C53.2@486.5,119.8 C52.2@487.2,119.8 487.2,119.125 X3.2@487.425,118.9 X3.4@488.775,117.9 ; v1(489.4,104) 489.45,103.95 C12.2@490.2,103.95 ; v1(489.6,108.5) C51.2@489.6,109.1 ; R39.2@489.9,129 v1(489.9,129.6) ; v1(490.658,101.2) 490.629,101.171 490.7,101.1 U1.12@490.7,100.1 ; R95.2@491.3,119 v1(491.3,119.6) ; v1(492.7,128) S2.1@493.85,128 ; C14.2@492.8,103.3 v1(492.8,103.9) ; C15.2@492.8,107.1 X1.4@493.725,107.1 493.725,107.875 v1(493.7,107.9) ; R98.2@492.9,119 v1(492.9,119.6) ; v1(493,115.7) C36.2@493.6,115.7 ; C56.2@493.8,119 v1(493.8,119.6) ; R86.2@494.6,116.5 v1(494.6,117.2) ; v1(495.1,105.3) 495.075,105.325 X1.2@495.075,106.1 C16.2@496,106.1 ; C48.2@495.35,110 v1(496.2,110) ; C47.2@495.35,111.3 495.65,111.6 v1(496.1,111.6) ; v1(495.6,65.5) C10.2@495.6,66.35 495.65,66.3 496.4,66.3 496.6,66.5 R15.2@496.6,67 ; U1.47@495.7,88.6 495.7,87.85 495.85,87.7 v1(496.9,87.7) 497.4,87.7 C5.2@497.525,87.575 ; v1(495.8,74.5) C39.2@495.8,75.1 ; C7.2@496.2,102.8 v1(496.2,103.4) ; U8.10@496.95,71.1 496.95,70.05 v1(497,70) 497,69.55 C31.2@497.45,69.1 ; U1.63@498.2,97.6 498.9,97.6 v1(499.2,97.9) 499.7,97.9 C9.2@499.8,98 ; R27.2@498.6,75.1 499.9,75.1 v1(500,75) ; C1.2@501.25,97.1 501.25,97.85 v1(501.3,97.9) ; D5.1@502.17,69.2 502.5,69.2 v1(502.5,68.5) ; R51.1@512.1,94.4 v1(512.1,95.1) ; v2(513.4,75.3) D17B.3@514.325,75.3 ; J1.11@513.56,128.132 513.6,128.172 v1(513.6,129.9) ; v2(514.4,90.3) D17A.3@515.325,90.3 ; v2(514.7,72.1) R13B.2@515.4,72.1 C35B.2@515.4,73.1 ; v2(514.7,77.5) C34B.2@515.4,77.5 R12B.2@515.4,78.5 ; v2(514.7,87.1) R13A.2@515.4,87.1 C35A.2@515.4,88.1 ; v2(514.7,92.5) C34A.2@515.4,92.5 R12A.2@515.4,93.5 ; J1.7@516.1,128.132 v1(516.1,129.9) ; J1.5@517.37,128.132 517.37,129.87 v1(517.4,129.9) ; R10.2@518.2,102.6 v1(518.8,102.6) ; C17.2@520.5,102.85 520.55,102.8 v1(521.5,102.8)
  L1 w0.3: U8.2@497.7,73 C30.2@499.4,73
  L1 w0.5: U6P.1@128.55,77.89 128.55,76.75 128.9,76.4 C22P.2@129.95,76.4 129.95,75.35 v1(129.9,75.3) ; U6O.1@151.55,77.89 151.55,76.75 151.9,76.4 C22O.2@152.95,76.4 152.95,75.35 v1(152.9,75.3) ; U6N.1@174.55,77.89 174.55,76.75 174.9,76.4 C22N.2@175.95,76.4 175.95,75.35 v1(175.9,75.3) ; U6M.1@197.55,77.89 197.55,76.75 197.9,76.4 C22M.2@198.95,76.4 198.95,75.35 v1(198.9,75.3) ; U6L.1@220.55,77.89 220.55,76.75 220.9,76.4 C22L.2@221.95,76.4 221.95,75.35 v1(221.9,75.3) ; U6K.1@243.55,77.89 243.55,76.75 243.9,76.4 C22K.2@244.95,76.4 244.95,75.35 v1(244.9,75.3) ; U6J.1@266.55,77.89 266.55,76.75 266.9,76.4 C22J.2@267.95,76.4 267.95,75.35 v1(267.9,75.3) ; U6I.1@289.55,77.89 289.55,76.75 289.9,76.4 C22I.2@290.95,76.4 290.95,75.35 v1(290.9,75.3) ; U6H.1@312.55,77.89 312.55,76.75 312.9,76.4 C22H.2@313.95,76.4 313.95,75.35 v1(313.9,75.3) ; U6G.1@335.55,77.89 335.55,76.75 335.9,76.4 C22G.2@336.95,76.4 336.95,75.35 v1(336.9,75.3) ; U6F.1@358.55,77.89 358.55,76.75 358.9,76.4 C22F.2@359.95,76.4 359.95,75.35 v1(359.9,75.3) ; U6E.1@381.55,77.89 381.55,76.75 381.9,76.4 C22E.2@382.95,76.4 382.95,75.35 v1(382.9,75.3) ; U6D.1@404.55,77.89 404.55,76.75 404.9,76.4 C22D.2@405.95,76.4 405.95,75.35 v1(405.9,75.3) ; U6C.1@427.55,77.89 427.55,76.75 427.9,76.4 C22C.2@428.95,76.4 428.95,75.35 v1(428.9,75.3) ; U6B.1@450.55,77.89 450.55,76.75 450.9,76.4 C22B.2@451.95,76.4 451.95,75.35 v1(451.9,75.3) ; U6A.1@473.55,77.89 473.55,76.75 473.9,76.4 C22A.2@474.95,76.4 474.95,75.35 v1(474.9,75.3) ; v1(513,100.5) U2.2@513.99,100.5 v1(514.98,100.5) ; C18.2@518.5,101.05 v1(518.5,101.8) ; J11B.0@518.839,77.899 518.85,77.888 J11B.B1@518.85,76.8 ; J11A.0@518.839,92.899 518.85,92.888 J11A.B1@518.85,91.8 ; J11B.0@518.839,69.271 518.85,69.282 J11B.A1@518.85,70.4 ; J11A.0@518.839,84.271 518.85,84.282 J11A.A1@518.85,85.4 ; C80B.2@521.55,79.8 523.2,79.8 523.6,79.4 J11B.0@523.6,77.925 ; C80A.2@521.55,94.8 523.2,94.8 523.6,94.4 J11A.0@523.6,92.925
  other v1: 499,73.7 502.4,73.7 501.5,75 479.8,75.6 480.6,75.6 481.4,75.6 482.2,75.6 483,75.6 483.8,75.6 484.6,75.6 485.4,75.6 486.2,75.6 506.2,102.6 507,102.6 507.8,102.6 488.9,112.7 490.9,112.7 488.9,114.7 490.9,114.7
I2C1.SCL_1: R21.1 R36.1 TP62.1 U9A.22 | length 120.3
  L1 w0.2: U9A.22@410,67.225 411.725,67.225 412.2,67.7 412.2,81 413.3,82.1 479.1,82.1 480.2,81 TP62.1@481.144,81 TP62.1@482.844,81 482.844,80.044 R21.1@482.5,79.7 ; R36.1@501.5,94.7 v1(502.2,94.7)
  L4 w0.2: TP62.1@482.844,81 484.2,81 485.1,81.9 499.5,81.9 502.2,84.6 v1(502.2,94.7)
I2C1.SDA_1: R35.1 R46A.2 R54.1 TP63.1 | length 114.1
  L1 w0.2: R46A.2@412.8,75.3 412.8,80.8 413.5,81.5 478.4,81.5 480.9,79 TP63.1@485.856,79 485.856,78.056 R54.1@485.5,77.7 ; R35.1@501.5,95.5 v1(502.6,95.5)
  L4 w0.2: TP63.1@485.856,79 485.856,80.256 486.9,81.3 500.6,81.3 502.9,83.6 502.9,95.2 v1(502.6,95.5)
I2C3.SCL_1: R4.1 R49.1 TP1.1 U9B.22 | length 311
  L1 w0.2: U9B.22@202.4,67.225 203.725,67.225 204.1,67.6 204.1,82 205.4,83.3 479.3,83.3 481,85 TP1.1@481.144,85 TP1.1@482.844,85 482.844,84.144 R49.1@482.4,83.7 ; v1(493.3,83.2) R4.1@493.3,85.3
  L4 w0.2: TP1.1@482.844,85 485.7,85 487.5,83.2 v1(493.3,83.2)
I2C3.SDA_1: R34.1 R37.1 R46B.2 TP2.1 | length 297.8
  L1 w0.2: R46B.2@204.8,76.3 204.8,81.6 205.9,82.7 481.7,82.7 482,83 TP2.1@484.144,83 TP2.1@485.844,83 485.844,82.144 R34.1@485.5,81.8 ; v1(492.5,82.6) R37.1@492.5,85.3
  L4 w0.2: TP2.1@485.844,83 486.9,83 487.3,82.6 v1(492.5,82.6)
LED0_2: R1.2 U1.37 | length 2.6
  L1 w0.203: R1.2@489.9,86.3 490.095,86.495 490.095,86.695 490.7,87.3 U1.37@490.7,88.6
LED1: R95.1 R96.2 U7.3 | length 3.3
  L1 w0.2: U7.3@490.15,115.65 490.15,117.05 490.5,117.4 R96.2@490.5,118 R95.1@491.3,118
LED1_2: R7.2 U1.38 | length 2.5
  L1 w0.203: R7.2@490.7,86.3 490.9,86.5 490.9,86.8 491.2,87.1 U1.38@491.2,88.6
LED2: R97.2 R98.1 U7.2 | length 4.1
  L1 w0.203: U7.2@490.65,115.65 490.65,116.15 491.1,116.6 491.7,116.6 492.1,117 R97.2@492.1,118 R98.1@492.9,118
LED2_2: R2.2 U1.39 | length 2.3
  L1 w0.203: R2.2@491.7,86.3 U1.39@491.7,88.6
MCU_nRST_2: C14.1 R30.2 R32.1 U1.7 | length 46.5
  L1 w0.203: C14.1@492.8,102.3 R30.2@493.6,102.3 493.6,101.8 493.2,101.4 U1.7@493.2,100.1 493.2,99.2 493.5,98.9 496.3,98.9 497.7,100.3 502.4,100.3 504.7,98 v1(508.8,98) ; v1(513.7,120.5) R32.1@513.7,121.1
  L4 w0.203: v1(508.8,98) 508.8,105.2 513.7,110.1 v1(513.7,120.5)
MCU_VDDA_2: C12.1 FB1.1 R11.2 U1.13 | length 6.8
  L1 w0.203: R11.2@487,103.7 487.6,103.7 v1(487.8,103.5) FB1.1@487.8,102.85 ; v1(489.436,102.463) 489.449,102.45 C12.1@490.2,102.45 490.154,102.404 490.154,100.146 U1.13@490.2,100.1
  L4 w0.203: v1(487.8,103.5) 488.837,102.463 v1(489.436,102.463)
nCS00_1: U4A.4 U9A.5 | length 72.2
  L1 w0.2: U9A.5@415.8,68.525 417.025,68.525 419.1,70.6 419.1,74.2 420.2,75.3 426,75.3 428.2,73.1 432.8,73.1 436,76.3 449.4,76.3 451.6,74.1 455.2,74.1 462,80.9 v1(468.3,80.9) ; v1(468.3,88.1) 468.335,88.135 U4A.4@468.335,89.7
  L4 w0.2: v1(468.3,80.9) v1(468.3,88.1)
nCS01_1: U4B.4 U9A.7 | length 46.8
  L1 w0.2: U9A.7@415.8,69.825 416.925,69.825 418.1,71 418.1,74.6 419.8,76.3 426.4,76.3 428.6,74.1 432.4,74.1 439.2,80.9 v1(445.3,80.9) ; v1(445.3,88.1) 445.335,88.135 U4B.4@445.335,89.7
  L4 w0.2: v1(445.3,80.9) v1(445.3,88.1)
nCS02_1: U4C.4 U9A.9 | length 21.9
  L1 w0.2: U9A.9@415.8,71.125 416.825,71.125 417.1,71.4 417.1,75.1 422.3,80.3 v1(422.3,80.9) ; v1(422.3,88.1) 422.335,88.135 U4C.4@422.335,89.7
  L4 w0.2: v1(422.3,80.9) v1(422.3,88.1)
nCS03_1: U4D.4 U9A.10 | length 40.9
  L1 w0.2: v1(399.3,88.1) 399.335,88.135 U4D.4@399.335,89.7 ; v1(414.159,71.751) 414.184,71.775 U9A.10@415.8,71.775
  L4 w0.2: v1(399.3,88.1) 399.3,74.2 397.7,72.6 397.7,69.8 399.248,68.252 402.552,68.252 406.1,71.8 414.2,71.8 414.159,71.759 v1(414.159,71.751)
nCS04_1: U4E.4 U9A.13 | length 45.1
  L1 w0.2: v1(376.3,82.1) 398.3,82.1 407.325,73.075 U9A.13@410,73.075 ; v1(376.3,88.1) 376.335,88.135 U4E.4@376.335,89.7
  L4 w0.2: v1(376.3,82.1) v1(376.3,88.1)
nCS05_1: U4F.4 U9A.15 | length 69.9
  L1 w0.2: v1(353.3,82.1) 374.9,82.1 382.4,74.6 386.1,74.6 387.7,76.2 402.7,76.2 407.125,71.775 U9A.15@410,71.775 ; v1(353.3,88.1) 353.335,88.135 U4F.4@353.335,89.7
  L4 w0.2: v1(353.3,82.1) v1(353.3,88.1)
nCS06_1: U4G.4 U9A.17 | length 94
  L1 w0.2: v1(330.3,82.1) 351.9,82.1 359.6,74.4 363.8,74.4 364.9,75.5 380,75.5 381.652,73.848 386.446,73.848 387.598,75 402.4,75 406.925,70.475 U9A.17@410,70.475 ; v1(330.3,88.1) 330.335,88.135 U4G.4@330.335,89.7
  L4 w0.2: v1(330.3,82.1) v1(330.3,88.1)
nCS07_1: U4H.4 U9A.19 | length 139.5
  L1 w0.2: v1(307.3,88.1) 307.335,88.135 U4H.4@307.335,89.7 ; v1(405.7,69.8) 406.325,69.175 U9A.19@410,69.175
  L4 w0.2: v1(307.3,88.1) 307.3,84 304.8,81.5 304.8,69.7 306.4,68.1 311.2,68.1 313.1,70 313.1,73.5 317,77.4 319.7,77.4 329.2,67.9 381.8,67.9 383.9,65.8 391.2,65.8 392.9,67.5 403.4,67.5 v1(405.7,69.8)
nCS08_1: U4I.4 U9B.5 | length 92.1
  L1 w0.2: U9B.5@208.2,68.525 214.075,68.525 v1(214.1,68.5) ; v1(284.3,88.1) 284.335,88.135 U4I.4@284.335,89.7
  L4 w0.2: v1(214.1,68.5) 215,68.5 215.2,68.3 247.4,68.3 248.8,66.9 256.8,66.9 258.2,68.3 272.9,68.3 284.3,79.7 v1(284.3,88.1)
nCS09_1: U4J.4 U9B.7 | length 68.7
  L1 w0.2: U9B.7@208.2,69.825 209.925,69.825 215.2,75.1 218.8,75.1 220.3,73.6 226.6,73.6 229.6,76.6 242.4,76.6 244.4,74.6 248.3,74.6 255.8,82.1 v1(261.3,82.1) ; v1(261.3,88.1) 261.335,88.135 U4J.4@261.335,89.7
  L4 w0.2: v1(261.3,82.1) v1(261.3,88.1)
nCS10_1: U4K.4 U9B.9 | length 43.5
  L1 w0.2: U9B.9@208.2,71.125 209.625,71.125 214.6,76.1 219.5,76.1 221,74.6 226,74.6 233.5,82.1 v1(238.3,82.1) ; v1(238.3,88.1) 238.335,88.135 U4K.4@238.335,89.7
  L4 w0.2: v1(238.3,82.1) v1(238.3,88.1)
nCS11_1: U4L.4 U9B.11 | length 20.9
  L1 w0.2: U9B.11@208.2,72.425 209.325,72.425 211.9,75 211.9,78.7 v1(215.3,82.1) ; v1(215.3,88.1) 215.335,88.135 U4L.4@215.335,89.7
  L4 w0.2: v1(215.3,82.1) v1(215.3,88.1)
nCS12_1: U4M.4 U9B.14 | length 22.4
  L1 w0.2: v1(192.3,83.3) 195.6,80 195.6,77.7 200.875,72.425 U9B.14@202.4,72.425 ; v1(192.3,88.1) 192.335,88.135 U4M.4@192.335,89.7
  L4 w0.2: v1(192.3,83.3) v1(192.3,88.1)
nCS13_1: U4N.4 U9B.16 | length 47.7
  L1 w0.2: v1(169.3,83.3) 169.3,80.4 175.3,74.4 179.3,74.4 181,76.1 195.6,76.1 200.575,71.125 U9B.16@202.4,71.125 ; v1(169.3,88.1) 169.335,88.135 U4N.4@169.335,89.7
  L4 w0.2: v1(169.3,83.3) v1(169.3,88.1)
nCS14_1: U4O.4 U9B.18 | length 81.4
  L1 w0.2: v1(146.3,88.1) 146.335,88.135 U4O.4@146.335,89.7 ; v1(200.5,69.8) 200.525,69.825 U9B.18@202.4,69.825
  L4 w0.2: v1(146.3,88.1) 146.3,74.3 144.7,72.7 144.7,69.7 146.1,68.3 174.2,68.3 176.4,66.1 184.6,66.1 186.8,68.3 198.3,68.3 199.8,69.8 v1(200.5,69.8)
nCS15_1: U4P.4 U9B.19 | length 121
  L1 w0.2: v1(123.3,88.1) 123.335,88.135 U4P.4@123.335,89.7 ; v1(199.9,69.1) 199.975,69.175 U9B.19@202.4,69.175
  L4 w0.2: v1(123.3,88.1) 123.3,83.2 121,80.9 121,69.2 122.7,67.5 128.9,67.5 131,69.6 131,76.6 133,78.6 136.2,78.6 140.4,74.4 140.4,71 143.5,67.9 174,67.9 176.2,65.7 184.8,65.7 187,67.9 198.7,67.9 v1(199.9,69.1)